# Altium PCB ControlBoard.PcbDoc
Units mil, origin at the board's own origin, x right, y up, seen from the top; angles counter-clockwise.
Board outline 1929.13 x 2755.91 mil, 2 copper layers (Top Layer, Bottom Layer); 32 components, 19 nets, 132 pads, 7 vias.
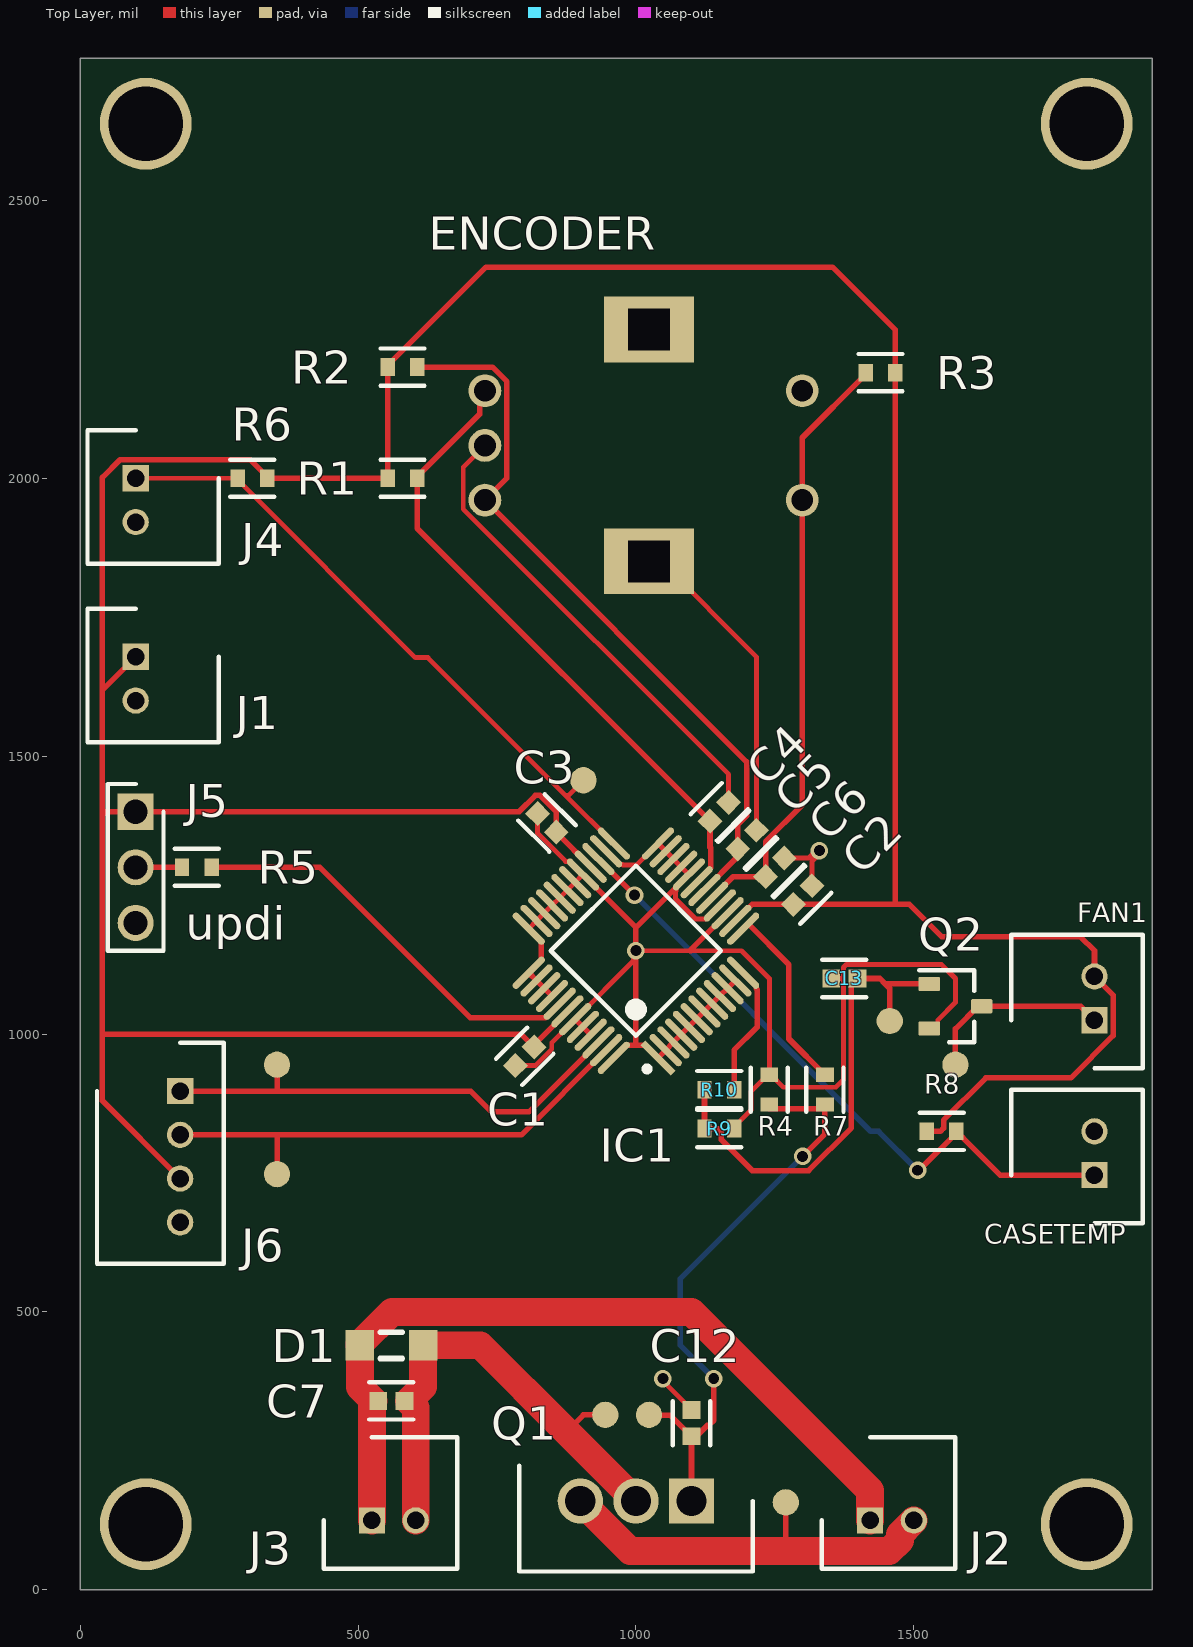
[diagram p0: Top Layer view]
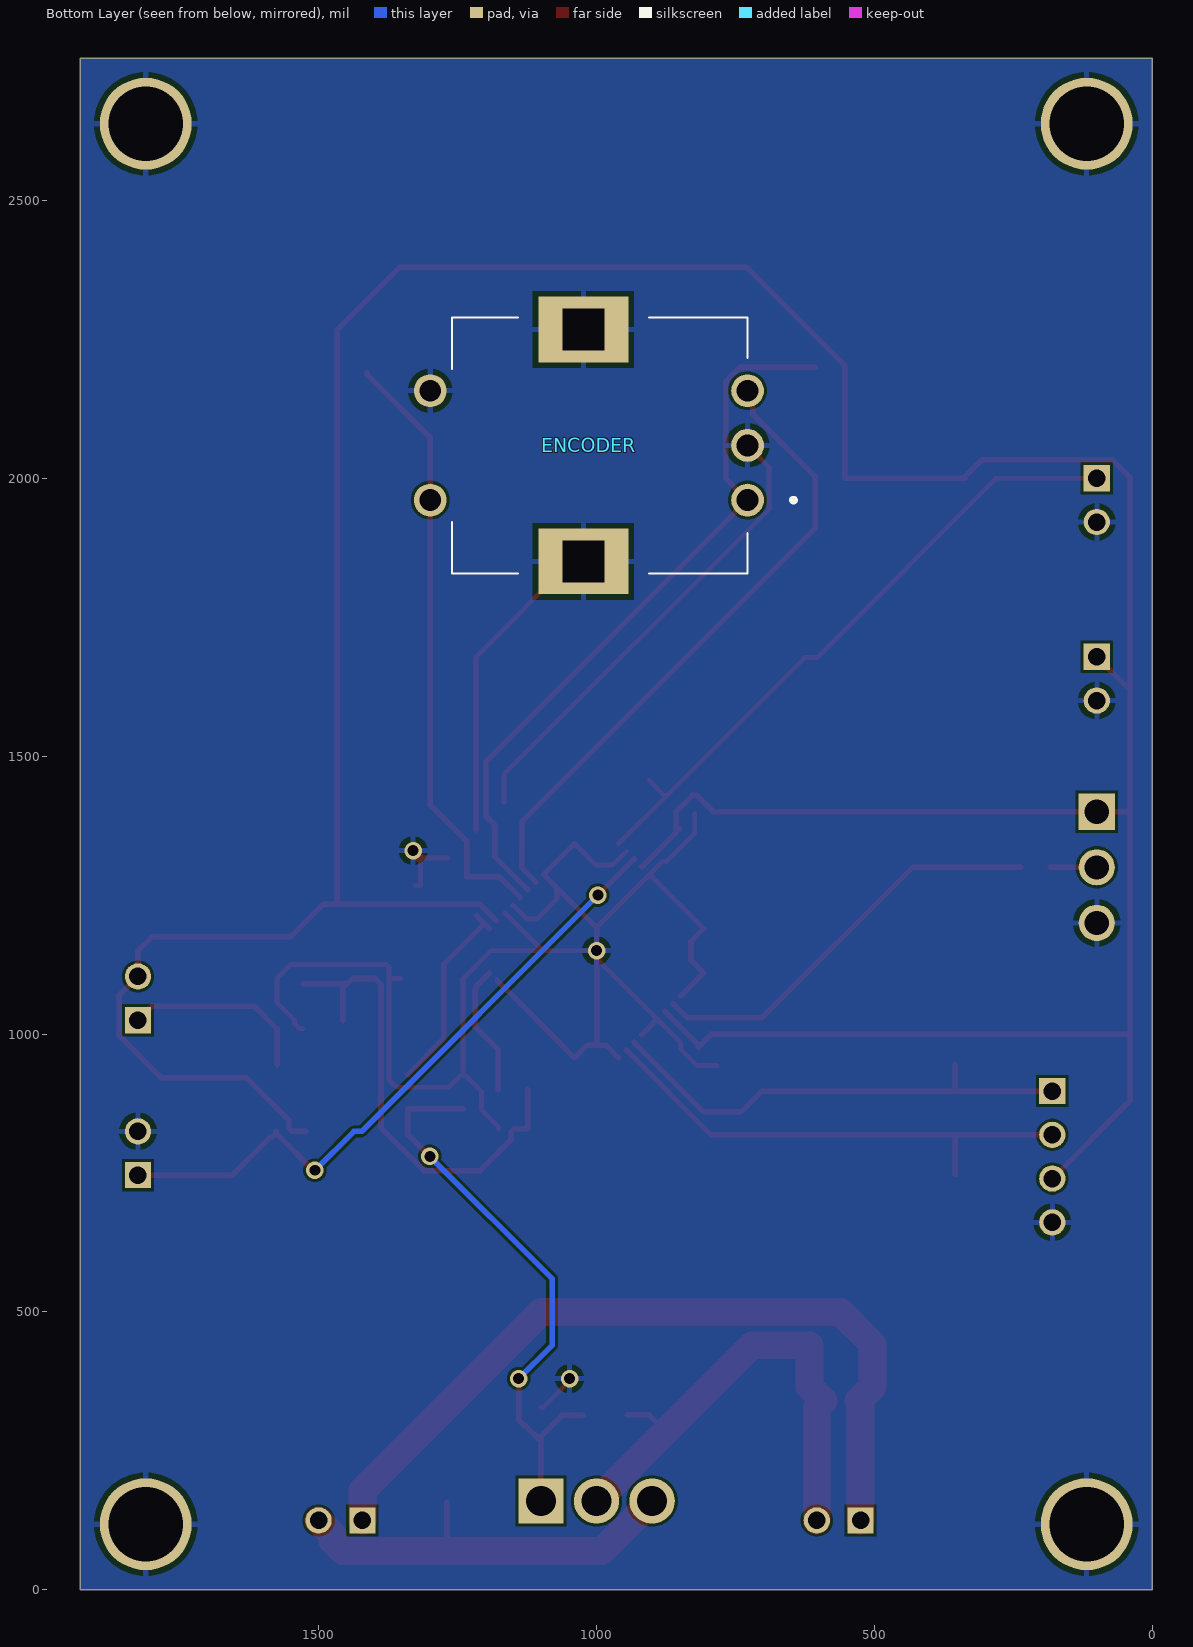
[diagram p1: Bottom Layer view, seen from below]
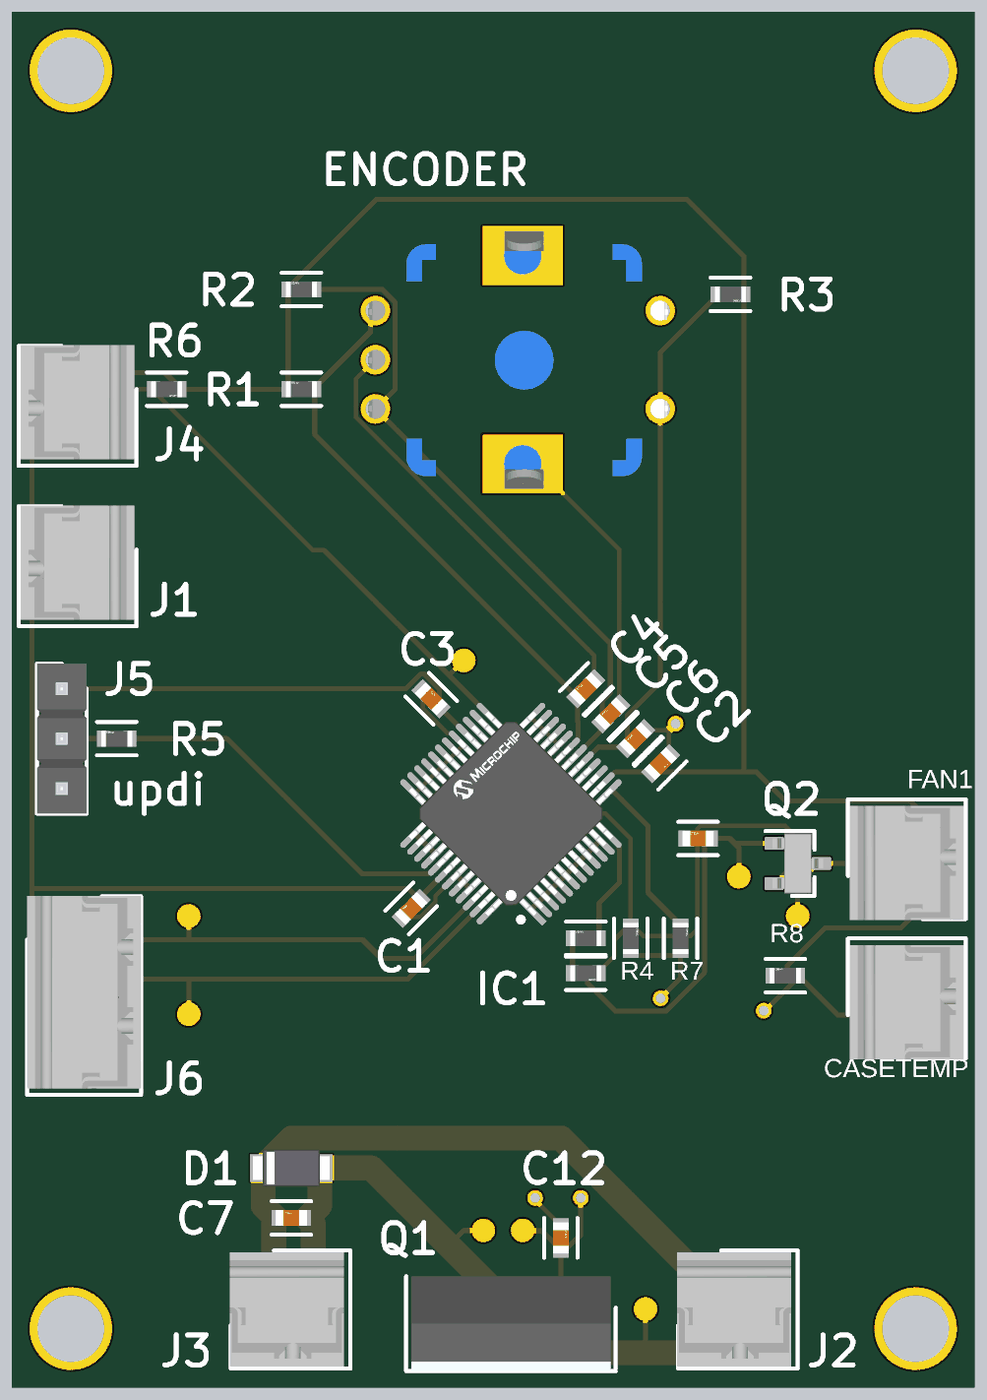
[diagram p2: 3D render of the assembled board from above, using the file's embedded part models]

## Layer stack, top to bottom
Top Solder: solder mask 0.4, Solder Resist, Dk 3.5
Top Layer: signal copper 1.4
Dielectric 1: dielectric 12.6, FR-4, Dk 4.8
Bottom Layer: signal copper 1.4
Bottom Solder: solder mask 0.4, Solder Resist, Dk 3.5

## Board outline
0,0 1929.13,0 1929.13,2755.91 0,2755.91

## Design rules (kind name [scope] priority, off if disabled: settings)
Clearance [All] p1: gap=5 ignorepadtopadclearanceinfootprint=FALSE
PolygonConnect [All] p1: connectstyle=Relief reliefconductorwidth=10 reliefentries=4 polygonreliefangle="90 Angle" airgapwidth=10
RoutingVias [All] p1: holewidth=28 width=50 viastyle="Through Hole" minholewidth=7.87 minwidth=19.68 maxholewidth=78.74 maxwidth=98.43
SolderMaskExpansion [All] p1: expansion=4 istentingtop=FALSE
Width [All] p1: maxlimit=50 minlimit=5 preferedwidth=10 minimp=50.000000 maximp=50.000000 favimp=50.000000
30 further rules are at their usual default settings.

## Components (designator, comment, footprint, x,y, rotation, side; value= is the part's Value field where it differs from the comment)
C1 "100nF" CAP_0603US-IPC_C 800,960 r45 top
C2 "100nf" CAP_0603US-IPC_C 1300,1250 r225 top
C3 "100nF" CAP_0603US-IPC_C 840,1380 r315 top
C4 "100nF" CAP_0603US-IPC_C 1150,1400 r45 top
C5 "100nF" CAP_0603US-IPC_C 1200,1350 r45 top
C6 "100nF" CAP_0603US-IPC_C 1250,1300 r45 top
C7 "10nF" CAP_0603US-IPC_C 560,340 r0 top
C12 "100nF" CAP_0603US-IPC_C 1100,300 r270 top
C13 "100nF" CAP_0603US-IPC_C 1375,1100 r0 top
CASETEMP "CaseTemp" CON_M1x2PIN_SHROUDED 1825,746.26 r270 top (schematic designator J8)
D1 "ZENER_TH" ZENER_SMF_DO219AB 560,440 r0 top
ENCODER "EC11E09204A4" ENC_ROT_EC11 728.35,2059.06 r90 bottom
FAN1 "FAN1" CON_M1x2PIN_SHROUDED 1825,1025 r270 top (schematic designator J7)
IC1 "ATMEGA4809-AU" IC_ATmega4809AF-IPC_A 1000,1150 r135 top
J1 "Power input" CON_M1x2PIN_SHROUDED 100,1678.74 r90 top
J2 "CON_F1x2Pin" CON_M1x2PIN_SHROUDED 1421.26,125 r180 top
J3 "CON_F1x2Pin" CON_M1x2PIN_SHROUDED 525,125 r180 top
J4 "PlateTemp" CON_M1x2PIN_SHROUDED 100,2000 r90 top
J5 "890-70-003-10-001101" CON_M1x3PIN 100,1400 r270 top
J6 "CON_M1x4Pin" CON_M1x4PIN_Shrouded 180,897.48 r90 top
Q1 "IRFB7545PBF" MOSFET_TO254P483X1016X1994 1100,160 r180 top
Q2 "IRFB7545PBF" MOSFET_SOT23_MMFTN6001 1575,1050 r0 top
R1 "1K" RES_0603US_TF-IPC_C 580,2000 r180 top
R2 "1K" RES_0603US_TF-IPC_C 580,2200 r180 top
R3 "1K" RES_0603US_TF-IPC_C 1440,2190 r0 top
R4 "10K" RES_0603US_TF-IPC_C 1240,900 r90 top
R5 "4,7K" RES_0603US_TF-IPC_C 210,1300 r180 top
R6 "1K" RES_0603US_TF-IPC_C 310,2000 r0 top
R7 "1K" RES_0603US_TF-IPC_C 1340,900 r90 top
R8 "1K" RES_0603US_TF-IPC_C 1550,825 r180 top
R9 "10K" RES_0603US_TF-IPC_C 1150,830 r0 top
R10 "1K" RES_0603US_TF-IPC_C 1150,900 r180 top

## Footprints (in the part's own frame and the unit in brackets; to place one, negate y for a bottom-side part, rotate by r counter-clockwise, add the part's x,y. Pads: shape width x height; smd on the part's side, far side on the other; paste and mask are expansions set on the pad)
CAP_0603US-IPC_C [mil]
  rect 31.84x31.97 smd paste+0 mask+0: 1(-23.69,0) 2(23.69,0)
  silkscreen extent -40,-33 40,33, body extent -44,-22 44,22, height 10
CON_M1x2PIN_SHROUDED [mm]
  rect 1.2x1.2 hole 0.8: 1(0,0)
  round 1.2 hole 0.8: 2(-2,0)
  silkscreen extent -3.9,-3.8 2.2,2.2, body extent -3.56,-3.7 2.24,2.1, height 7.31
CON_M1x3PIN [mm]
  rect 1.65x1.65 hole 1.1: 1(0,0)
  round 1.65 hole 1.1: 2(2.54,0) 3(5.08,0)
  silkscreen extent -1.27,-1.27 6.35,1.27, body extent -1.27,-1.27 6.35,1.27, height 8.54
CON_M1x4PIN_Shrouded [mm]
  rect 1.2x1.2 hole 0.8: 1(0,0)
  round 1.2 hole 0.8: 2(-2,0) 3(-4,0) 4(-6,0)
  silkscreen extent -7.9,-2 2.2,3.8, body extent -7.58,-2 2.22,3.8, height 6.85
ENC_ROT_EC11 [mm]
  round 1.5 hole 1: A1(-2.5,0) B1(2.5,0) C1(0,0) D1(-2.5,14.5) D2(2.5,14.5)
  rect 3x4.1 hole 1.9 square: MH1(-5.3,7.5) MH2(5.3,7.5)
  silkscreen extent -5.85,-2.2 5.85,13.5, body extent -6.58,-0.36 6.52,14.9, height 24.49
IC_ATmega4809AF-IPC_A [mm]
  rect 1.955x0.312 smd paste+0 mask+0: 1(-4.176,2.75)
  rrect100% 1.955x0.312 smd paste+0 mask+0: 2(-4.175,2.25) 3(-4.175,1.75) 4(-4.176,1.25) 5(-4.175,0.75) 6(-4.175,0.25) 7(-4.175,-0.25) 8(-4.176,-0.75) 9(-4.175,-1.25) 10(-4.175,-1.75) 11(-4.176,-2.25) 12(-4.175,-2.75) 25(4.175,-2.75) 26(4.175,-2.25) 27(4.175,-1.75) 28(4.175,-1.25) 29(4.175,-0.75) 30(4.175,-0.25) 31(4.175,0.25) 32(4.175,0.75) 33(4.175,1.25) 34(4.175,1.75) 35(4.175,2.25) 36(4.175,2.75)
  rrect100% 0.312x1.955 smd paste+0 mask+0: 13(-2.75,-4.175) 14(-2.25,-4.176) 15(-1.75,-4.175) 16(-1.25,-4.175) 17(-0.75,-4.176) 18(-0.25,-4.175) 19(0.25,-4.175) 20(0.75,-4.175) 21(1.25,-4.176) 22(1.75,-4.175) 23(2.25,-4.175) 24(2.75,-4.176) 37(2.75,4.175) 38(2.25,4.175) 39(1.75,4.175) 40(1.25,4.175) 41(0.75,4.175) 42(0.25,4.175) 43(-0.25,4.175) 44(-0.75,4.175) 45(-1.25,4.175) 46(-1.75,4.175) 47(-2.25,4.175) 48(-2.75,4.175)
  silkscreen extent -4.3,-2.75 2.75,3.58, body extent -5.65,-5.65 5.65,5.65, height 0.25
MOSFET_SOT23_MMFTN6001 [mm] "SOT23, 3-Leads, IPC Medium Density, TO-236"
  rrect25% 1x0.65 smd: 1(-1.2,1.02) 2(1.2,0) 3(-1.2,-1.02)
  silkscreen extent -1.65,-1.65 0.85,1.65, body extent -1.3,-1.52 1.3,1.52, height 1.3
MOSFET_TO254P483X1016X1994 [mm]
  rect 2.07x2.07 hole 1.38: 1(0,0)
  round 2.07 hole 1.38: 2(2.54,0) 3(5.08,0)
  silkscreen extent -2.8,-1.6 7.87,3.22, body extent -2.54,-1.61 7.62,3.22, height 18.86
RES_0603US_TF-IPC_C [mil]
  rect 25.93x31.97 smd paste+0 mask+0: 1(-26.64,0) 2(26.64,0)
  silkscreen extent -40,-33 40,33, body extent -44,-22 44,22, height 10
ZENER_SMF_DO219AB [mm] "16V"
  rect 1.3x1.4 smd paste+0 mask+0.08: 1(-1.45,0) 2(1.45,0)
  silkscreen extent -0.5,-0.6 0.5,0.6, body extent -1.95,-0.95 1.95,0.95, height 1.07

## Part data
C1 C2 C3 C12 C13: library part D_Capacitor_0805CC, Manufacturer="AVX Interconnect / Elco", Part Number=08051C103JAT2A
C4 C5 C6: library part D_Capacitor_0603CC, "CAP CER 0.1UF 25V X7R 0603", Case Code (Imperial)=0603, Case Code (Metric)=1608, Case/Package=Ceramic, Dielectric=X7R, Max Operating Temperature=125°C, Min Operating Temperature=-55°C, Tolerance=10%, Voltage Rating=25V, Capacitance=100nF, Depth=0.8mm, Lead Free="Lead Free", Length=1.6mm, Packaging="Tape and Reel", Radiation Hardening=No, RoHS Compliant=Yes, Voltage Rating (DC)=25V
C7: library part D_Capacitor_0603CC, "CAP CER 0.1UF 25V X7R 0603", Capacitance=100nF, Case Code (Imperial)=0603, Case Code (Metric)=1608, Case/Package=Ceramic, Dielectric=X7R, Max Operating Temperature=125°C, Min Operating Temperature=-55°C, Tolerance=10%, Voltage Rating=25V, Depth=0.8mm, Lead Free="Lead Free", Length=1.6mm, Packaging="Tape and Reel", Radiation Hardening=No, RoHS Compliant=Yes, Voltage Rating (DC)=25V
CASETEMP FAN1 J4: library part CON_F1x2Pin, "Connector", Arrow Part Number=SMC-1-02-1-GT, Manufacturer_Name="Adam Tech", Arrow Price/Stock=https://www.arrow.com/en/products/smc-1-02-1-gt/adam-tech, Datasheet Link=https://app.adam-tech.com/products/download/data_sheet/203379/smc-1-xx-1-gt-data-sheet.pdf, Height=4.381mm, Manufacturer_Part_Number=SMC-1-02-1-GT
ENCODER: library part ENC_ROTEC11E09, "Mechanical Encoder Rotary Incremental Flat 0.01N.m Straight Quadrature Digital Square Wave 9PPR Through Hole PC Pin Automotive", Manufacturer_Name="ALPS Electric", Mouser Part Number=688-EC11E09204A4, Datasheet Link=https://componentsearchengine.com/Datasheets/2/EC11E09204A4.pdf, Geometry.Height=24.5mm, Manufacturer_Part_Number=EC11E09204A4, Mouser Price/Stock=https://www.mouser.co.uk/ProductDetail/Alps-Alpine/EC11E09204A4?qs=PoKhxlfUXjKXlta7xVJCmA%3D%3D
IC1: library part IC_ATMega4809, "MCU 8-BIT", Case/Package=TQFP, Max Operating Temperature=85°C, Min Operating Temperature=-40°C, Core Architecture=AVR, Interface=I2C, Memory Size=48KB, Memory Type=FLASH, Mount="Surface Mount", Number of I/Os=41, Oscillator Type=Internal, Peripherals="Brown-out Detect/Reset", RoHS Compliant=Yes, Series="megaAVR® 0, Functional Safety (FuSa)"
J1: library part CON_F1x3Pin, "Connector", Arrow Part Number=SMC-1-02-1-GT, Manufacturer_Name="Adam Tech", Arrow Price/Stock=https://www.arrow.com/en/products/smc-1-02-1-gt/adam-tech, Datasheet Link=https://app.adam-tech.com/products/download/data_sheet/203379/smc-1-xx-1-gt-data-sheet.pdf, Height=4.381mm, Manufacturer_Part_Number=SMC-1-02-1-GT
J2: "Connector", Arrow Part Number=SMC-1-02-1-GT, Manufacturer_Name="Adam Tech", Arrow Price/Stock=https://www.arrow.com/en/products/smc-1-02-1-gt/adam-tech, Datasheet Link=https://app.adam-tech.com/products/download/data_sheet/203379/smc-1-xx-1-gt-data-sheet.pdf, Height=4.381mm, Manufacturer_Part_Number=SMC-1-02-1-GT
J3: "Gated signal", Arrow Part Number=SMC-1-02-1-GT, Manufacturer_Name="Adam Tech", Arrow Price/Stock=https://www.arrow.com/en/products/smc-1-02-1-gt/adam-tech, Datasheet Link=https://app.adam-tech.com/products/download/data_sheet/203379/smc-1-xx-1-gt-data-sheet.pdf, Height=4.381mm, Manufacturer_Part_Number=SMC-1-02-1-GT
J5: library part CON_3pin, "Headers & Wire Housings", Manufacturer_Name=Preci-Dip, Datasheet Link=https://www.precidip.com/en/Products/PCB-Connectors/pview/890-PP-NNN-10-001101.html, Geometry.Height=8.54mm, Manufacturer_Part_Number=890-70-003-10-001101, Use=UPDI
Q1 Q2: library part MOSFET_IRFB745PBF, "IRFB7545PBF N-Channel MOSFET, 95 A, 60 V StrongIRFET, 3-Pin TO-220AB Infineon", Manufacturer_Name=Infineon, Mouser Part Number=942-IRFB7545PBF, Geometry.Height=4.83mm, Manufacturer_Part_Number=IRFB7545PBF, Mouser Price/Stock=https://www.mouser.co.uk/ProductDetail/Infineon-Technologies/IRFB7545PBF?qs=a7rcPCEf1Q%252BjvB7f7k7q9g%3D%3D
R1 R2 R3 R4 R5 R6 R7 R8 R9 R10: library part D_Resistor_TF0603, "SMD 0603 Thick Film 4.7kΩ 5.00% 0.1W", Case Code (Imperial)=0603, Case Code (Metric)=1608, Max Operating Temperature=155°C, Max Power Dissipation=100mW, Min Operating Temperature=-55°C, Ratings=AEC-Q200, Resistance=4.7kR, Resistor Type="Thick Film", Temperature Coefficient=100ppm/°C, Tolerance=5%, Voltage Rating=50V, Case/Package=0603, Features="Moisture Resistant", Height=0.45mm, Lead Free="Lead Free", Length=1.6mm, Number of Terminations=2, Packaging="Tape and Reel", Power Rating=100mW, RoHS Compliant=Yes, Series=AC, Termination=SMD/SMT, Weight=7.1E-05oz, Width=0.8mm

## Free pads (board coordinates)
  round 165.35 hole 133.86: 1(118.11,118.11) 1(1811.02,2637.8) 1(1811.02,118.11) g(118.11,2637.8)
  round 47.24 smd paste-99999: 3(1023.62,314.96) 4(905.51,1456.69) 5(354.33,944.88) 6(354.33,748.03) 7(1574.8,944.88) 8(944.88,314.96) 9(1269.68,157.48) 10(1456.69,1023.62)

## Via types
v1: diameter 31.5, hole 19.68, Top Layer to Bottom Layer, 7 vias

## Nets (pads, with @x,y where several pads share a name; then routed paths per layer and width w, separated by ;. In a path a pad name is that pad's centre, name@x,y a point inside that pad or via, vN(x,y) a via of type N, cw(c..) or ccw(c..) an arc to the next point about the centre after c; other vN are vias at no path point)
+5: C1.2 C2.2 C3.2 FAN1.2 IC1.14 IC1.28 IC1.42 J1.1 J5.1 J6.3 R1.2 R2.2 R3.2 R6.2 R8.2 | length 7335.8
  Top Layer w10: J1.1 40,1618.74 ; J6.3 40,880 40,1000 ; C3.2@850.18,1369.41 C3.2@850.18,1369.82 ; IC1.42 816.75,980.67 C1.2 793.5,1000 40,1000 ; IC1.28 856.75,1362.85 C3.2 856.8,1363.3 856.8,1399.95 827.44,1429.31 819.15,1429.31 789.84,1400 J5.1 45.86,1400 40,1394.14 ; IC1.14@1179.5,1203.61 1209.19,1233.3 C2.2 ; C2.2 1283.3,1233.2 1470,1233.2 ; R8.2 1547.82,825 1553.68,830.86 1553.68,845.13 1629.73,921.18 1782.57,921.18 1858.62,997.24 1858.62,1070.12 FAN1.2 1825,1150 1800,1175 1550.3,1175 1492.1,1233.2 1470,1233.2 ; 40,1000 40,1394.14 ; 40,1394.14 40,1618.74 ; 40,1618.74 40,2001.39 72.24,2033.62 306.04,2033.62 336.64,2003.02 R6.2 R1.2 R2.2 553.36,2203.02 730.34,2380 1353.6,2380 1466.64,2266.96 R3.2 1466.64,1236.56 1470,1233.2
GND: C1.1 C2.1 C3.1 C4.2 C5.2 C6.2 C12.1 C13.1 CASETEMP.2 ENCODER.C1 ENCODER.D2 ENCODER.MH1 ENCODER.MH2 IC1.1 IC1.2 IC1.3 IC1.4 IC1.5 IC1.6 IC1.7 IC1.8 IC1.9 IC1.10 IC1.11 IC1.15 IC1.16 IC1.20 IC1.21 IC1.22 IC1.23 IC1.24 IC1.26 IC1.29 IC1.30 IC1.31 IC1.32 IC1.33 IC1.34 IC1.35 IC1.36 IC1.37 IC1.38 IC1.39 IC1.40 IC1.43 IC1.44 IC1.45 IC1.48 J1.2 J4.2 J5.3 J6.4 pad.1 pad.g Q2.3 R4.2 R9.2 | length 4902.2
  Top Layer w8.74: ENCODER.C1 689.45,2020.16 689.45,1944.52 1166.7,1467.26 1166.7,1416.8 C4.2 ; C1.1 783.3,943.2 819.06,943.2 848.68,972.82 848.68,984.76 IC1.43 995.65,1131.73 995.65,1145.65 v1(1000,1150) 1097.44,1150 1190,1150 1240,1100 R4.2@1240,934.52 ; IC1.36 IC1.35 IC1.33 IC1.32 IC1.30 IC1.29 881.09,1310.67 873.47,1310.67 823.2,1360.94 C3.1 C3.1 ; IC1.26 969.94,1305.33 975.83,1305.33 976.75,1304.41 1001.3,1304.41 IC1.24 IC1.20 ; ENCODER.MH1 1045.28,1850.39 1216.7,1678.97 1216.7,1366.8 C5.2 ; v1(1048.54,380) 1048.54,376.06 1096.06,328.54 C12.1@1100,328.54 ; IC1.20@1071.81,1263.57 1071.81,1257.68 1070.89,1256.76 1070.89,1243.9 1107.82,1206.97 1125.61,1206.97 1150.07,1231.44 IC1.16 ; R9.2 1176.64,833.02 1206.81,863.19 1206.81,896.47 1236.98,926.64 R4.2 1243.02,926.64 1265.36,904.31 1359.87,904.31 1373.4,917.84 1373.4,1100 ; C6.2 1266.8,1316.7 1310.55,1316.7 1323.84,1330 v1(1330,1330) 1330,1323.84 1316.7,1310.55 1316.7,1266.8 C2.1 C2.1@1326.75,1266.75 ; C13.1 1373.4,1100 ; Q2.3 1534.65,1009.84 1543.07,1018.27 1543.07,1025.16 1575,1057.09 1575,1100 1549.64,1125.36 1378.89,1125.36 1373.4,1119.87 1373.4,1100
  Top Layer w10: IC1.36 830.07,1166.82 830.07,1133.18 IC1.37 IC1.38 IC1.40 ; IC1.43 IC1.44 IC1.45 ; IC1.29 1000,1191.76 ; IC1.48 983.18,980.07 1000,980.07 ; IC1.20 1071.81,1263.57 1000,1191.76 ; 1097.44,1150 IC1.15 ; IC1.11 IC1.8 IC1.4 IC1.1 1016.82,980.07 1000,980.07 ; 1000,980.07 v1(1000,1150) 1000,1191.76
NetC4_1: C4.1 ENCODER.B1 IC1.19 R1.1 | length 1163.7
  Top Layer w10: ENCODER.B1 718.96,2148.09 718.96,2115.34 606.64,2003.02 R1.1 606.64,1909.86 C4.1 1133.3,1383.2 1133.3,1336.07 1134.38,1334.99 1134.38,1298.92 1109.28,1273.82 IC1.19
NetC5_1: C5.1 ENCODER.A1 IC1.18 R2.1 | length 1329.7
  Top Layer w10: R2.1 741.73,2200 767.87,2173.85 767.87,2000.16 ENCODER.A1 1199.31,1489.66 1199.31,1392.85 1183.2,1376.74 C5.1 C5.1 1183.25,1319.33 IC1.18
NetC6_1: C6.1 ENCODER.D1 IC1.17 R3.1 | length 1093.2
  Top Layer w10: IC1.17 1175.06,1283.3 C6.1 ; C6.1 C6.1 ; R3.1 1413.12,2189.76 1413.12,2186.74 1299.21,2072.83 ENCODER.D1 1299.21,1412.46 1233.2,1346.45 C6.1
NetC7_1: C7.1 D1.1 J2.1 J3.1 | length 1458.2
  Top Layer w50: J3.1 525,336.56 528.44,340 503.5,364.93 503.5,439.41 D1.1 502.91,441.97 560.94,500 1100,500 1421.26,178.74 J2.1
NetC7_2: C7.2 D1.2 J3.2 pad.8 Q1.2 | length 911.6
  Top Layer w10: 875.3,284.75 905.51,314.96 pad.8
  Top Layer w50: J3.2 603.74,327.82 591.56,340 617.09,365.52 D1.2 720.05,440 875.3,284.75 Q1.2 Q1.2
NetC12_2: C12.2 pad.3 Q1.1 R4.1 R7.1 | length 1050.9
  Top Layer w10: pad.3 1024.58,314 1062.24,314 1099.93,276.31 C12.2 Q1.1 ; C12.2@1104.4,271.91 1128.38,295.9 1130.72,295.9 1140,305.19 v1(1140,380) ; R4.1@1240,865.48 1340,865.48 1340,820 v1(1300,780)
  Bottom Layer w10: v1(1140,380) 1080,440 1080,560 v1(1300,780)
NetC13_2: C13.2 pad.10 Q2.1 R9.1 R10.2 | length 882.3
  Top Layer w10: R10.2 R9.1 1147.82,830 1153.68,824.14 1153.68,809.87 1209.29,754.25 1310.67,754.25 1387.77,831.36 1387.77,1089.08 C13.2 1438.78,1100 1448.62,1090.16 ; pad.10 1456.69,1082.09 1448.62,1090.16 ; Q2.1 1448.62,1090.16
NetIC1_12: IC1.12 R10.1 | length 237.8
  Top Layer w10: R10.1 1176.64,970.99 1217.9,1012.25 1217.9,1080.22 1216.1,1082.01 1216.1,1087.01 IC1.12
NetIC1_13: IC1.13 R7.2 | length 361.9
  Top Layer w10: IC1.13 IC1.13@1200.8,1197.69 ; IC1.13@1215.66,1212.55 IC1.13@1200.8,1197.69 ; R7.2 1275,991.64 1275,1125 1202.31,1197.69 IC1.13@1200.8,1197.69
NetIC1_25: IC1.25 J4.1 pad.4 R6.1 | length 1177.2
  Top Layer w8.74: J4.1 R6.1 283.36,1996.98 602.97,1677.36 625.75,1677.36 874,1429.12 ; pad.4 877.94,1429.12 874,1429.12 ; IC1.25 874,1429.12
NetIC1_27: CASETEMP.1 IC1.27 R8.1 | length 1186.6
  Top Layer w10: IC1.27 v1(997.43,1250) ; v1(1506.64,755) 1509.66,755 R8.1@1576.64,821.98 ; R8.1 R8.1@1576.64,821.98 ; CASETEMP.1 1655.38,746.26 1587.63,814.01 1584.61,814.01 R8.1@1576.64,821.98
  Bottom Layer w10: v1(997.43,1250) 1422.43,825 1436.64,825 v1(1506.64,755)
NetIC1_41: IC1.41 R5.1 | length 748.7
  Top Layer w10: R5.1 431.34,1300 701.8,1029.54 837.16,1029.54 862.26,1054.64 IC1.41
NetIC1_46: IC1.46 J6.1 pad.5 | length 867.5
  Top Layer w10: J6.1 355,897.48 ; pad.5 354.33,898.15 355,897.48 ; IC1.46 807.43,860 740,860 702.52,897.48 686.12,897.48 508.77,897.48 355,897.48
NetIC1_47: IC1.47 J6.2 pad.6 | length 900.5
  Top Layer w10: J6.2 355,818.74 ; pad.6 354.33,818.07 355,818.74 ; IC1.47 794.01,818.74 355,818.74
NetJ2_2: J2.2 pad.9 Q1.3 | length 758.1
  Top Layer w10: 1259.84,70 1269.68,79.84 pad.9
  Top Layer w50: Q1.3 900,159.95 989.95,70 1259.84,70 1455.93,70 1474.88,88.95 1474.88,99.88 J2.2
NetJ5_2: J5.2 R5.2 | length 83.4
  Top Layer w10: J5.2 R5.2
NetJ7_1: FAN1.1 pad.7 Q2.2 | length 341.9
  Top Layer w10: pad.7 1574.8,1009.45 1615.35,1050 Q2.2 1800,1050 FAN1.1

## Polygon pours and split planes (outlines as drawn)
GND on Bottom Layer "GND_L02_P000" (solid, pour order 0): 0,2755.91 1929.13,2755.91 1929.13,0 0,0

## Silkscreen, mask and mechanical layers (free items; w line width, h text height)
Top Overlay:
  text "updi" at 190,1169.99 h60